# EAGLE board dash-board1 (EAGLE 4.16)
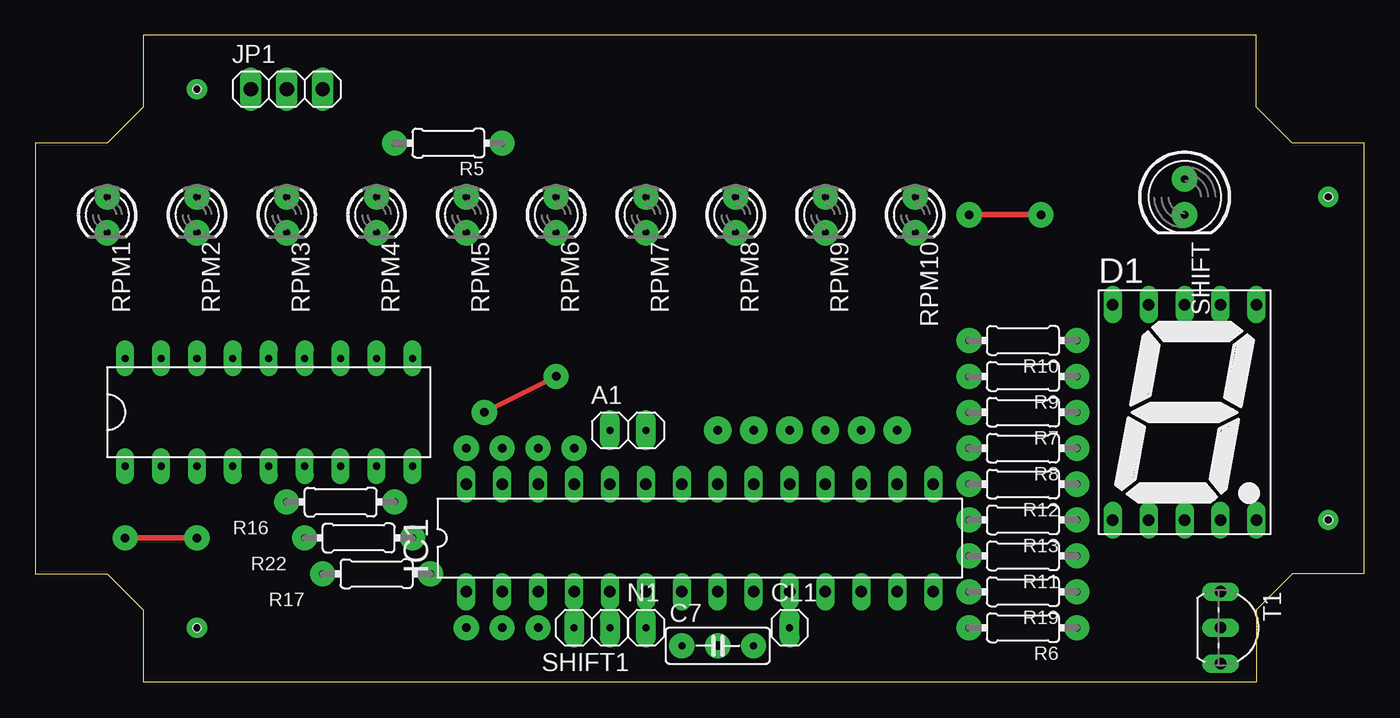
[diagram p0: board, top side]
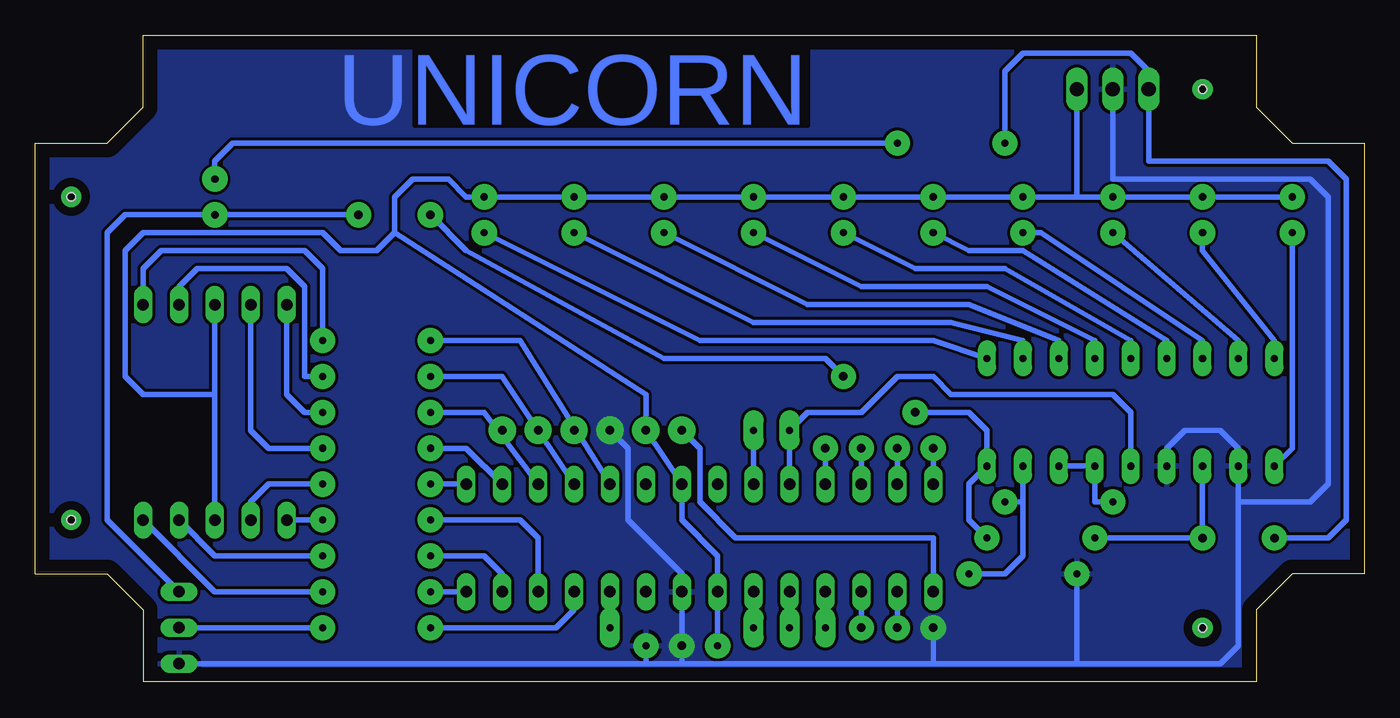
[diagram p1: board, bottom side, seen from below]

Size 93.98 x 45.72 mm. Coordinates in mm from the lower left corner, seen from the top.
Outline: 7.62,0 86.36,0 86.36,5.08 88.9,7.62 93.98,7.62 93.98,38.1 88.9,38.1 86.36,40.64 86.36,45.72 7.62,45.72 7.62,40.64 5.08,38.1 0,38.1 0,7.62 5.08,7.62 7.62,5.08 7.62,0
Copper layers (1*16): Top 0.035mm / dielectric 1.5mm / Bottom 0.035mm
Design rules "default": minimum track width 10mil, minimum drill 10mil, track to track 8mil, track to pad 8mil, pad to pad 8mil, via to via 8mil, smd to smd 8mil, copper to edge 40mil, drill to drill 8mil, minimum pad ring 10mil, minimum via ring 8mil, stop-mask expansion 4mil, vias tented up to drill 0mil, thermal gap 10mil
Holes 0.6 mm at 91.44,11.43 91.44,34.29 11.43,41.91 11.43,3.81

## Footprints (pad centres in the part's own frame; a part is rotated, then mirrored left to right if it is on the bottom)
1X02 = drill 0.5 pad 1.422 long: 1 -1.27,0; 2 1.27,0
C050-025X075 = drill 0.5 pad 1.778 round: 1 -2.54,0; 2 2.54,0
1X01 = drill 0.5 pad 1.422 long: 1 0,0
7SEG-13 = drill 0.813 long: 1 -5.08,-7.62; 2 -2.54,-7.62; 3 0,-7.62; 4 2.54,-7.62; 5 5.08,-7.62; 6 5.08,7.62; 7 2.54,7.62; 8 0,7.62; 9 -2.54,7.62; 10 -5.08,7.62
DIL28-3 = drill 0.813 long: 1 -16.51,-3.81; 2 -13.97,-3.81; 3 -11.43,-3.81; 4 -8.89,-3.81; 5 -6.35,-3.81; 6 -3.81,-3.81; 7 -1.27,-3.81; 8 1.27,-3.81; 9 3.81,-3.81; 10 6.35,-3.81; 11 8.89,-3.81; 12 11.43,-3.81; 13 13.97,-3.81; 14 16.51,-3.81; 15 16.51,3.81; 16 13.97,3.81; 17 11.43,3.81; 18 8.89,3.81; 19 6.35,3.81; 20 3.81,3.81; 21 1.27,3.81; 22 -1.27,3.81; 23 -3.81,3.81; 24 -6.35,3.81; 25 -8.89,3.81; 26 -11.43,3.81; 27 -13.97,3.81; 28 -16.51,3.81
1X03 = drill 1.016 long: 1 -2.54,0; 2 0,0; 3 2.54,0
0204/7 = drill 0.5 pad 1.778 round: 1 -3.81,0; 2 3.81,0
LED3MM = drill 0.5 pad 1.778 round: A -1.27,0; K 1.27,0
LED5MM = drill 0.5 pad 1.778 round: A -1.27,0; K 1.27,0
TO92-EBC = drill 0.813 long: B 0,-1.27; C -2.54,-1.27; E 2.54,-1.27
DIL18 = drill 0.5 pad 1.27 long: 1 -3.81,11.43; 2 -3.81,8.89; 3 -3.81,6.35; 4 -3.81,3.81; 5 -3.81,1.27; 6 -3.81,-1.27; 7 -3.81,-3.81; 8 -3.81,-6.35; 9 -3.81,-8.89; 10 3.81,-8.89; 11 3.81,-6.35; 12 3.81,-3.81; 13 3.81,-1.27; 14 3.81,1.27; 15 3.81,3.81; 16 3.81,6.35; 17 3.81,8.89; 18 3.81,11.43

## Placement (x,y rotation side)
A1  [1X02]  41.91,17.78 0 top
C7  [C050-025X075]  48.26,2.54 0 top
CL1  [1X01]  53.34,3.81 0 top
D1  [7SEG-13]  81.28,19.05 0 top
IC1  MEGA8-P  [DIL28-3]  46.99,10.16 0 top
JP1  [1X03]  17.78,41.91 0 top
N1  [1X01]  43.18,3.81 0 top
R5  [0204/7]  29.21,38.1 180 top
R6  [0204/7]  69.85,3.81 180 top
R7  [0204/7]  69.85,19.05 180 top
R8  [0204/7]  69.85,16.51 180 top
R9  [0204/7]  69.85,21.59 180 top
R10  [0204/7]  69.85,24.13 180 top
R11  [0204/7]  69.85,8.89 180 top
R12  [0204/7]  69.85,13.97 180 top
R13  [0204/7]  69.85,11.43 180 top
R16  [0204/7]  21.59,12.7 0 top
R17  [0204/7]  24.13,7.62 180 top
R19  [0204/7]  69.85,6.35 180 top
R22  [0204/7]  22.86,10.16 0 top
RPM1  [LED3MM]  5.08,33.02 270 top
RPM2  [LED3MM]  11.43,33.02 270 top
RPM3  [LED3MM]  17.78,33.02 270 top
RPM4  [LED3MM]  24.13,33.02 270 top
RPM5  [LED3MM]  30.48,33.02 270 top
RPM6  [LED3MM]  36.83,33.02 270 top
RPM7  [LED3MM]  43.18,33.02 270 top
RPM8  [LED3MM]  49.53,33.02 270 top
RPM9  [LED3MM]  55.88,33.02 270 top
RPM10  [LED3MM]  62.23,33.02 270 top
SHIFT  [LED5MM]  81.28,34.29 270 top
SHIFT1  [1X02]  39.37,3.81 180 top
T1  [TO92-EBC]  85.09,3.81 270 top
U$3  LM3914  [DIL18]  17.78,19.05 90 top

## Library data of the parts
A1 CL1 JP1 N1 SHIFT1 = pinhead
C7 R5-R13 R16 R17 R19 R22 = rcl
D1 = special
IC1 = atmel
RPM1-RPM10 SHIFT = led
T1 = transistor
U$3 = rnie04

## Nets
0V: C7.2 IC1.8 JP1.2 R17.2 T1.E U$3.2 U$3.4
+5V: C7.1 D1.3 D1.8 IC1.7 IC1.21 JP1.3 RPM1.A RPM2.A RPM3.A RPM4.A RPM5.A RPM6.A RPM7.A RPM8.A RPM9.A RPM10.A
+12V: JP1.1 R5.2 R22.1 U$3.3
N$1: CL1.1 IC1.10
N$4: RPM1.K U$3.1
N$5: RPM2.K U$3.18
N$6: RPM3.K U$3.17
N$7: RPM4.K U$3.16
N$8: RPM5.K U$3.15
N$9: RPM6.K U$3.14
N$10: RPM7.K U$3.13
N$11: RPM8.K U$3.12
N$12: RPM9.K U$3.11
N$13: RPM10.K U$3.10
N$18: D1.10 R7.1
N$20: R22.2 SHIFT.K T1.C U$3.9
N$21: R5.1 SHIFT.A
N$22: R6.1 T1.B
N$24: D1.9 R8.1
N$25: D1.7 R9.1
N$26: D1.6 R10.1
N$27: D1.4 R11.1
N$28: D1.2 R12.1
N$29: D1.1 R13.1
N$30: IC1.19 R10.2
N$31: IC1.18 R9.2
N$32: IC1.17 R7.2
N$33: IC1.16 R8.2
N$34: IC1.15 R12.2
N$35: IC1.12 R13.2
N$36: IC1.13 R11.2
N$37: A1.1 IC1.24 U$3.5
N$38: A1.2 IC1.23
N$40: IC1.4 SHIFT1.2
N$41: IC1.11 R6.2
N$43: R16.1 U$3.6 U$3.7
N$44: R16.2 R17.1 U$3.8
N$45: D1.5 R19.1
N$46: IC1.14 R19.2
N$47: IC1.6 N1.1
N$65: IC1.5 SHIFT1.1

## Tracks (layer width: path | path; a pad name or v marks a point on that pad's centre or on a via)
0V  (via drill 0.6 pad 1.78, 0.6 pad 1.93)
  Bottom 0.406: 8.89,12.7 U$3.2 8.89,16.51 10.16,17.78 12.7,17.78 13.97,16.51 U$3.4 | 20.32,1.27 30.48,1.27 | 30.48,1.27 48.26,1.27 | 48.26,1.27 v48.26,2.54 IC1.8 48.26,7.62 52.07,11.43 52.07,16.51 v53.34,17.78 | 8.89,12.7 3.81,12.7 2.54,13.97 2.54,34.29 3.81,35.56 17.78,35.56 JP1.2 | 48.26,1.27 50.8,1.27 | 50.8,1.27 T1.E | 50.8,1.27 C7.2 | 8.89,12.7 8.89,2.54 10.16,1.27 20.32,1.27 | 20.32,1.27 R17.2 | 30.48,1.27 v30.48,3.81
  pour Bottom: 0,45.72 0,0 93.98,0 93.98,45.72
+5V  (via drill 0.6 pad 1.93)
  Bottom 0.406: RPM1.A RPM2.A 20.32,34.29 | RPM5.A RPM4.A 20.32,34.29 | RPM5.A RPM6.A | RPM6.A RPM7.A | RPM7.A RPM8.A | RPM8.A RPM9.A | RPM9.A RPM10.A 63.5,34.29 64.77,35.56 67.31,35.56 68.58,34.29 68.58,31.75 | IC1.7 45.72,8.89 48.26,11.43 IC1.21 v50.8,17.78 50.8,20.32 68.58,31.75 | IC1.7 C7.1 IC1.7 | 20.32,34.29 JP1.3 | RPM8.A RPM9.A | RPM7.A RPM8.A | RPM6.A RPM7.A | RPM5.A RPM6.A | 20.32,34.29 RPM3.A | 81.28,20.32 D1.3 | 81.28,20.32 D1.8 | 68.58,31.75 69.85,30.48 72.39,30.48 73.66,31.75 86.36,31.75 87.63,30.48 87.63,21.59 86.36,20.32 81.28,20.32
+12V  (via drill 0.6 pad 1.78)
  Top 0.406: v6.35,10.16 v11.43,10.16
  Bottom 0.406: U$3.3 v11.43,10.16 R22.1 | v6.35,10.16 2.54,10.16 1.27,11.43 1.27,35.56 2.54,36.83 15.24,36.83 JP1.1 15.24,43.18 16.51,44.45 24.13,44.45 25.4,43.18 R5.2
N$1
  Bottom 0.406: CL1.1 IC1.10
N$2  (via drill 0.6 pad 1.42)
  other vias: 11.43,41.91
N$3  (via drill 0.6 pad 1.42)
  other vias: 11.43,3.81
N$4
  Bottom 0.406: RPM1.K 5.08,16.51 U$3.1
N$5
  Bottom 0.406: U$3.18 6.35,24.13 11.43,30.48 RPM2.K
N$6
  Bottom 0.406: U$3.17 8.89,24.13 RPM3.K
N$7
  Bottom 0.406: U$3.16 11.43,24.13 22.86,31.75 RPM4.K
N$8
  Bottom 0.406: U$3.15 13.97,24.13 24.13,30.48 27.94,30.48 RPM5.K
N$9
  Bottom 0.406: U$3.14 16.51,24.13 25.4,29.21 31.75,29.21 RPM6.K
N$10
  Bottom 0.406: U$3.13 19.05,24.13 26.67,27.94 35.56,27.94 RPM7.K
N$11
  Bottom 0.406: U$3.12 21.59,24.13 27.94,26.67 39.37,26.67 RPM8.K
N$12
  Bottom 0.406: U$3.11 24.13,24.13 29.21,25.4 43.18,25.4 RPM9.K
N$13
  Bottom 0.406: U$3.10 30.48,24.13 46.99,24.13 RPM10.K
N$14  (via drill 0.6 pad 1.42)
  other vias: 91.44,11.43
N$15  (via drill 0.6 pad 1.42)
  other vias: 91.44,34.29
N$16  (via drill 0.6 pad 1.93)
  other vias: 60.96,17.78
N$17  (via drill 0.6 pad 1.93)
  other vias: 55.88,17.78
N$18
  Bottom 0.406: R7.1 74.93,19.05 76.2,20.32 D1.10
N$19  (via drill 0.6 pad 1.93)
  Bottom 0.406: 30.48,6.35 30.48,10.16 44.45,10.16 46.99,12.7 46.99,16.51 v48.26,17.78
N$20  (via drill 0.6 pad 1.78)
  Top 0.406: v31.75,19.05 v36.83,21.59 | v66.04,33.02 v71.12,33.02
  Bottom 0.406: T1.C 88.9,11.43 88.9,31.75 87.63,33.02 SHIFT.K v71.12,33.02 | R22.2 27.94,11.43 27.94,13.97 U$3.9 26.67,17.78 27.94,19.05 v31.75,19.05 | v36.83,21.59 38.1,22.86 49.53,22.86 63.5,30.48 v66.04,33.02
N$21
  Bottom 0.406: R5.1 80.01,38.1 81.28,36.83 SHIFT.A
N$22
  Bottom 0.406: R6.1 T1.B
N$24
  Bottom 0.406: R8.1 77.47,16.51 78.74,17.78 D1.9
N$25
  Bottom 0.406: D1.7 83.82,27.94 82.55,29.21 76.2,29.21 74.93,27.94 74.93,21.59 R9.1
N$26
  Bottom 0.406: R10.1 73.66,29.21 74.93,30.48 85.09,30.48 86.36,29.21 D1.6
N$27
  Bottom 0.406: R11.1 81.28,8.89 D1.4
N$28
  Bottom 0.406: R12.1 77.47,13.97 78.74,12.7 D1.2
N$29
  Bottom 0.406: R13.1 D1.1
N$30
  Bottom 0.406: IC1.19 59.69,24.13 R10.2
N$31  (via drill 0.6 pad 1.93)
  Bottom 0.406: IC1.18 v58.42,17.78 60.96,21.59 R9.2
N$32
  Bottom 0.406: IC1.17 62.23,19.05 R7.2
N$33
  Bottom 0.406: IC1.16 63.5,16.51 R8.2
N$34
  Bottom 0.406: IC1.15 R12.2
N$35
  Bottom 0.406: IC1.12 58.42,10.16 59.69,11.43 R13.2
N$36
  Bottom 0.406: IC1.13 60.96,7.62 62.23,8.89 R11.2
N$37
  Bottom 0.406: U$3.5 16.51,19.05 17.78,20.32 29.21,20.32 30.48,21.59 33.02,21.59 35.56,19.05 39.37,19.05 A1.1 IC1.24
N$38
  Bottom 0.406: IC1.23 A1.2
N$40
  Bottom 0.406: SHIFT1.2 IC1.4
N$41
  Bottom 0.406: IC1.11 55.88,5.08 57.15,3.81 R6.2
N$43
  Bottom 0.406: U$3.6 U$3.7 U$3.6 | R16.1 19.05,12.7 U$3.6
N$44
  Bottom 0.406: 24.13,12.7 R16.2 | 24.13,12.7 U$3.8 | R17.1 25.4,7.62 24.13,8.89 24.13,12.7
N$45
  Bottom 0.406: R19.1 81.28,6.35 D1.5
N$46
  Bottom 0.406: IC1.14 R19.2
N$47
  Bottom 0.406: N1.1 IC1.6
N$56  (via drill 0.6 pad 1.78)
  Bottom 0.406: v30.48,16.51 30.48,15.24
N$57  (via drill 0.6 pad 1.78)
  Bottom 0.406: v33.02,16.51 33.02,15.24
N$58  (via drill 0.6 pad 1.78)
  Bottom 0.406: v35.56,16.51 35.56,15.24
N$59  (via drill 0.6 pad 1.78)
  Bottom 0.406: v38.1,16.51 38.1,15.24
N$61  (via drill 0.6 pad 1.78)
  Bottom 0.406: v33.02,3.81 33.02,5.08
N$62  (via drill 0.6 pad 1.78)
  Bottom 0.406: v35.56,3.81 35.56,5.08
N$65
  Bottom 0.406: SHIFT1.1 IC1.5

## Text on the board
Bottom: UNICORN